# Altium PCB UC-425.PcbDoc (part 1 of 2)
Units mil, origin at the board's own origin, x right, y up, seen from the top; angles counter-clockwise.
Board outline 1574.8 x 1574.8 mil, 4 copper layers (Top Layer, MidLayer1, GND, Bottom Layer); 88 components, 85 nets, 465 pads, 244 vias.
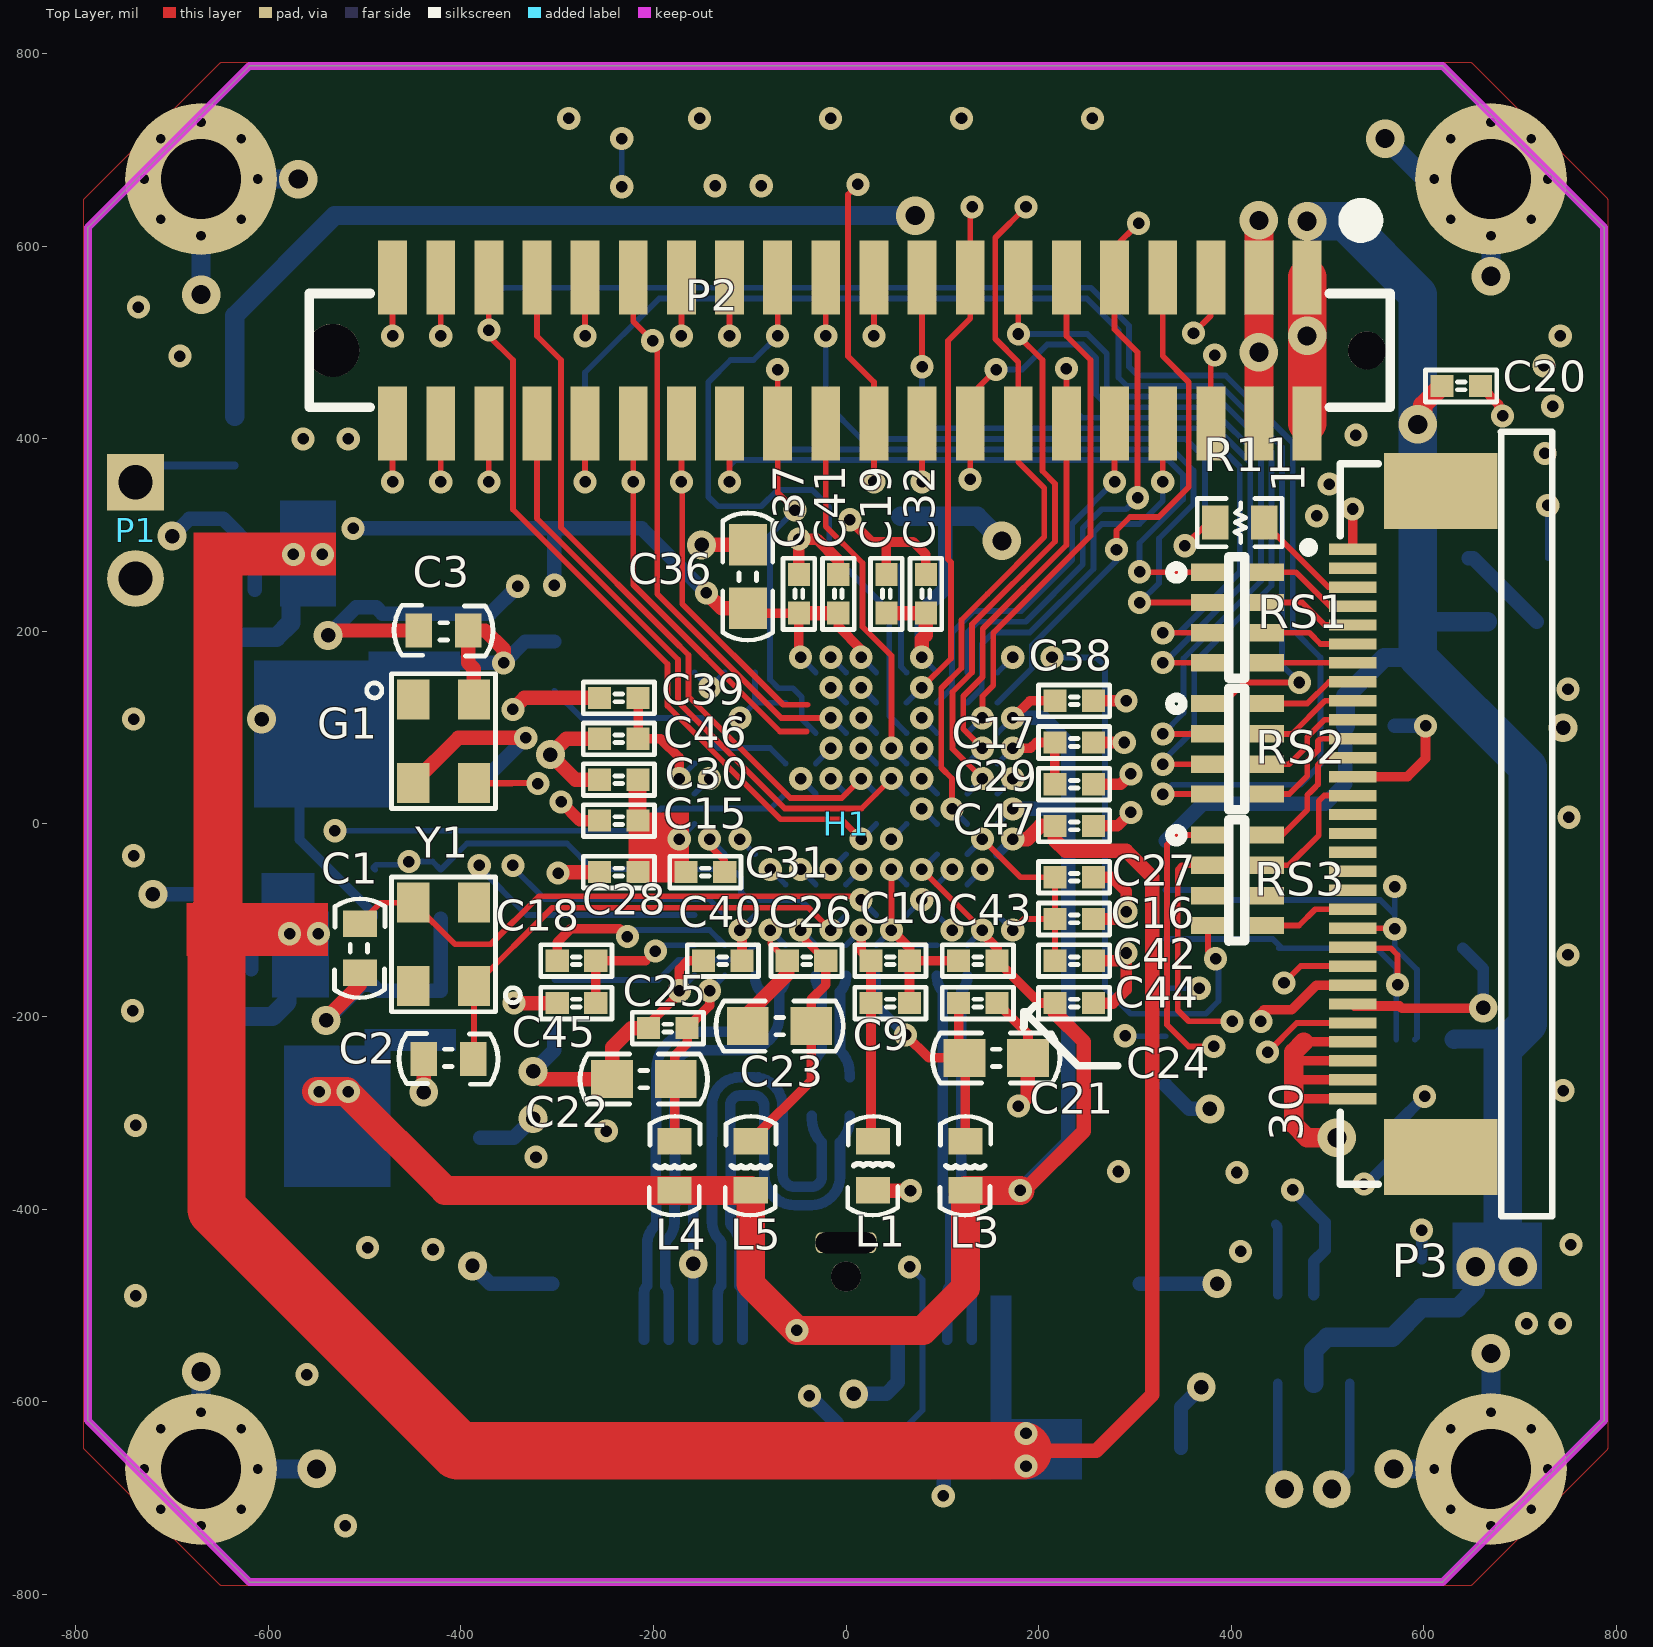
[diagram p0: Top Layer view]
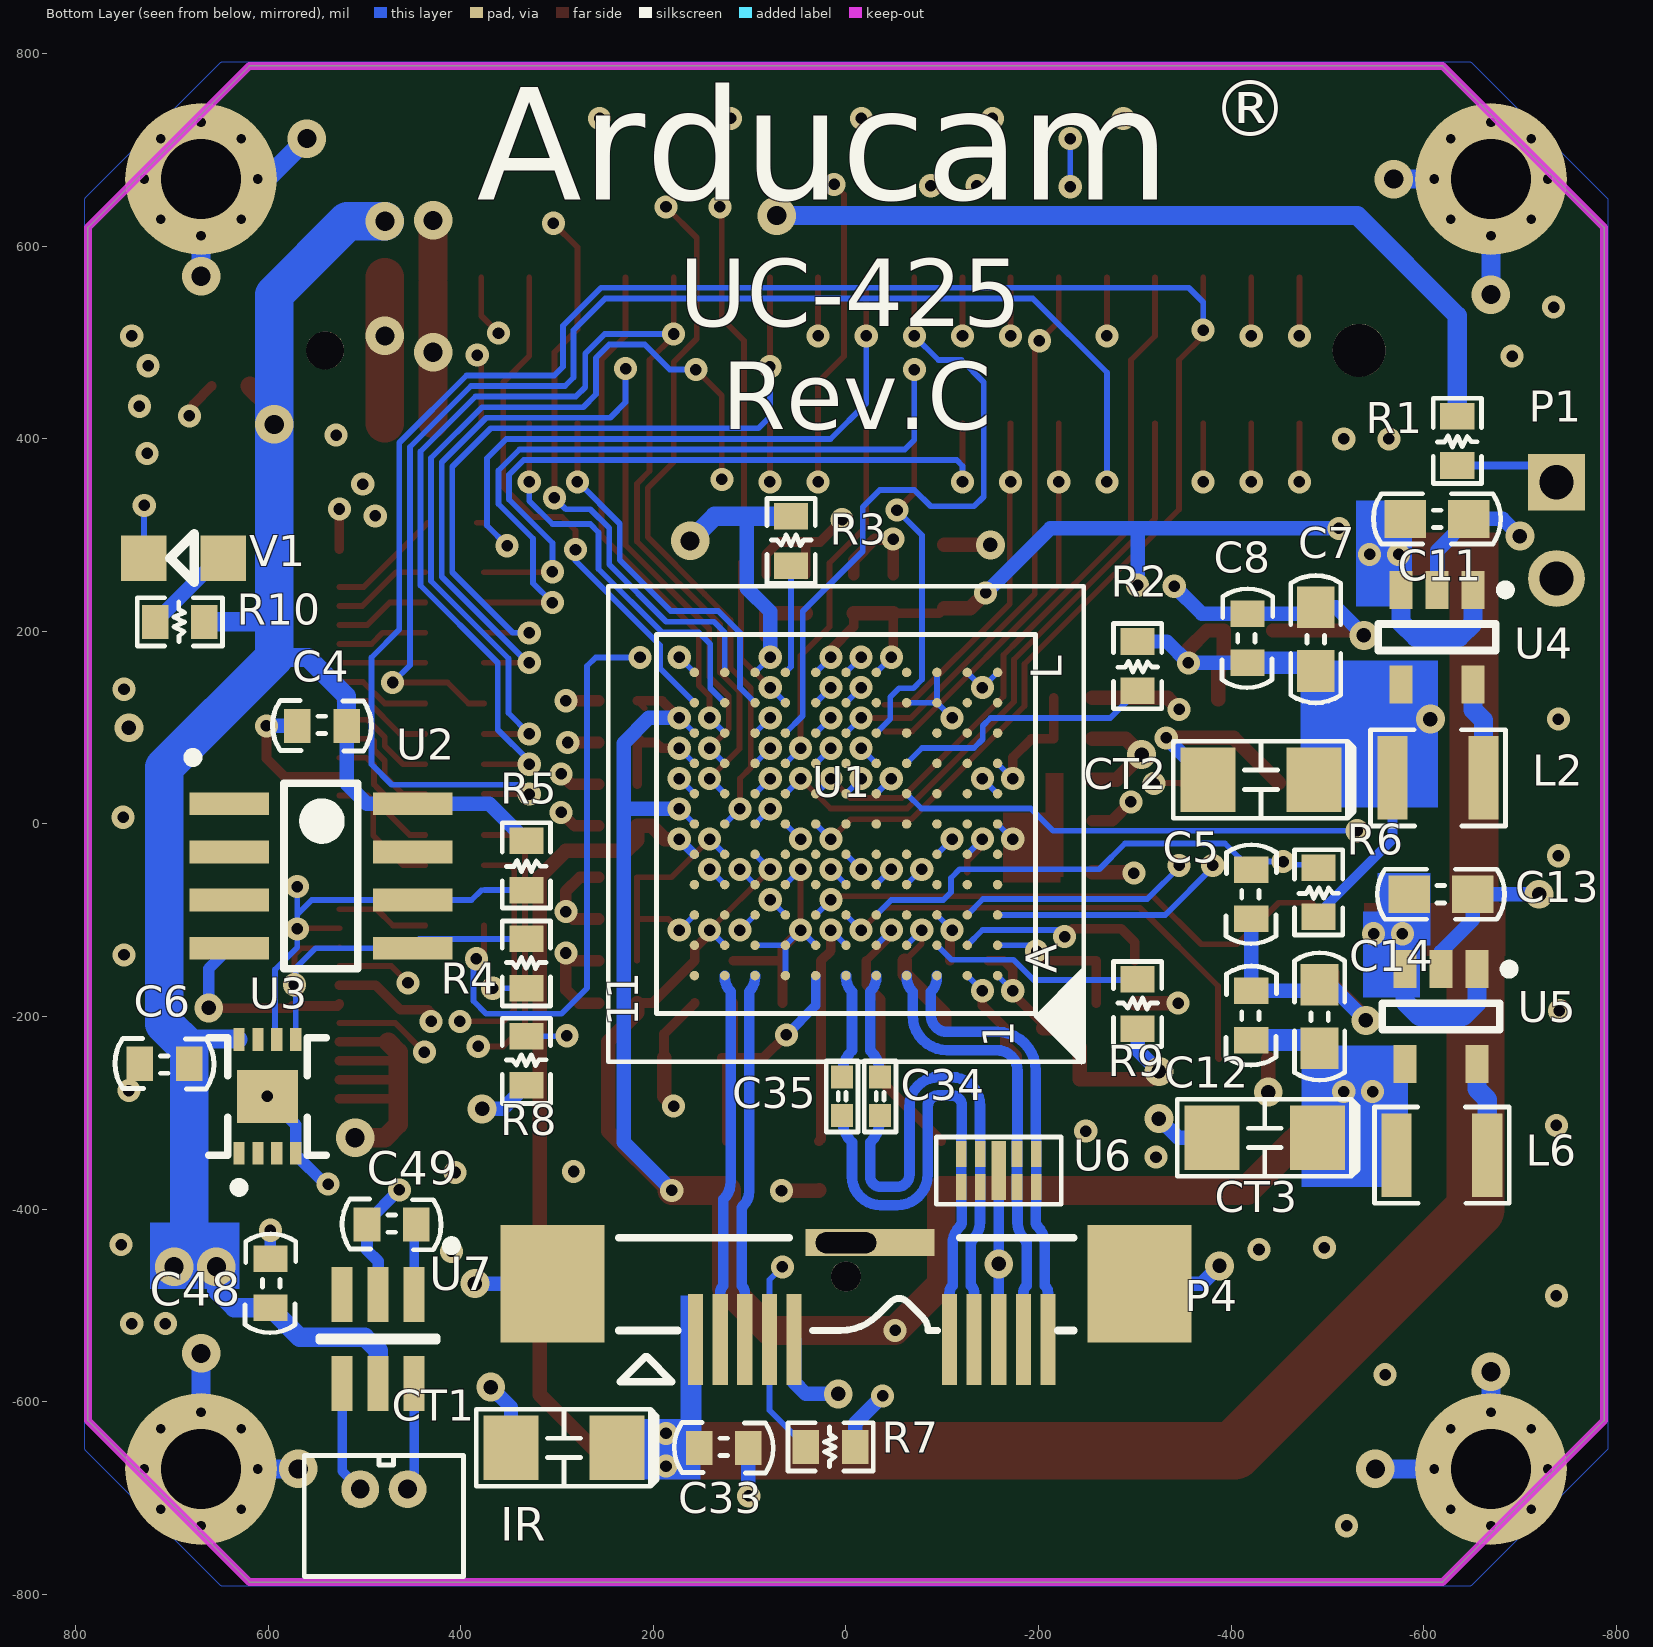
[diagram p1: Bottom Layer view, seen from below]
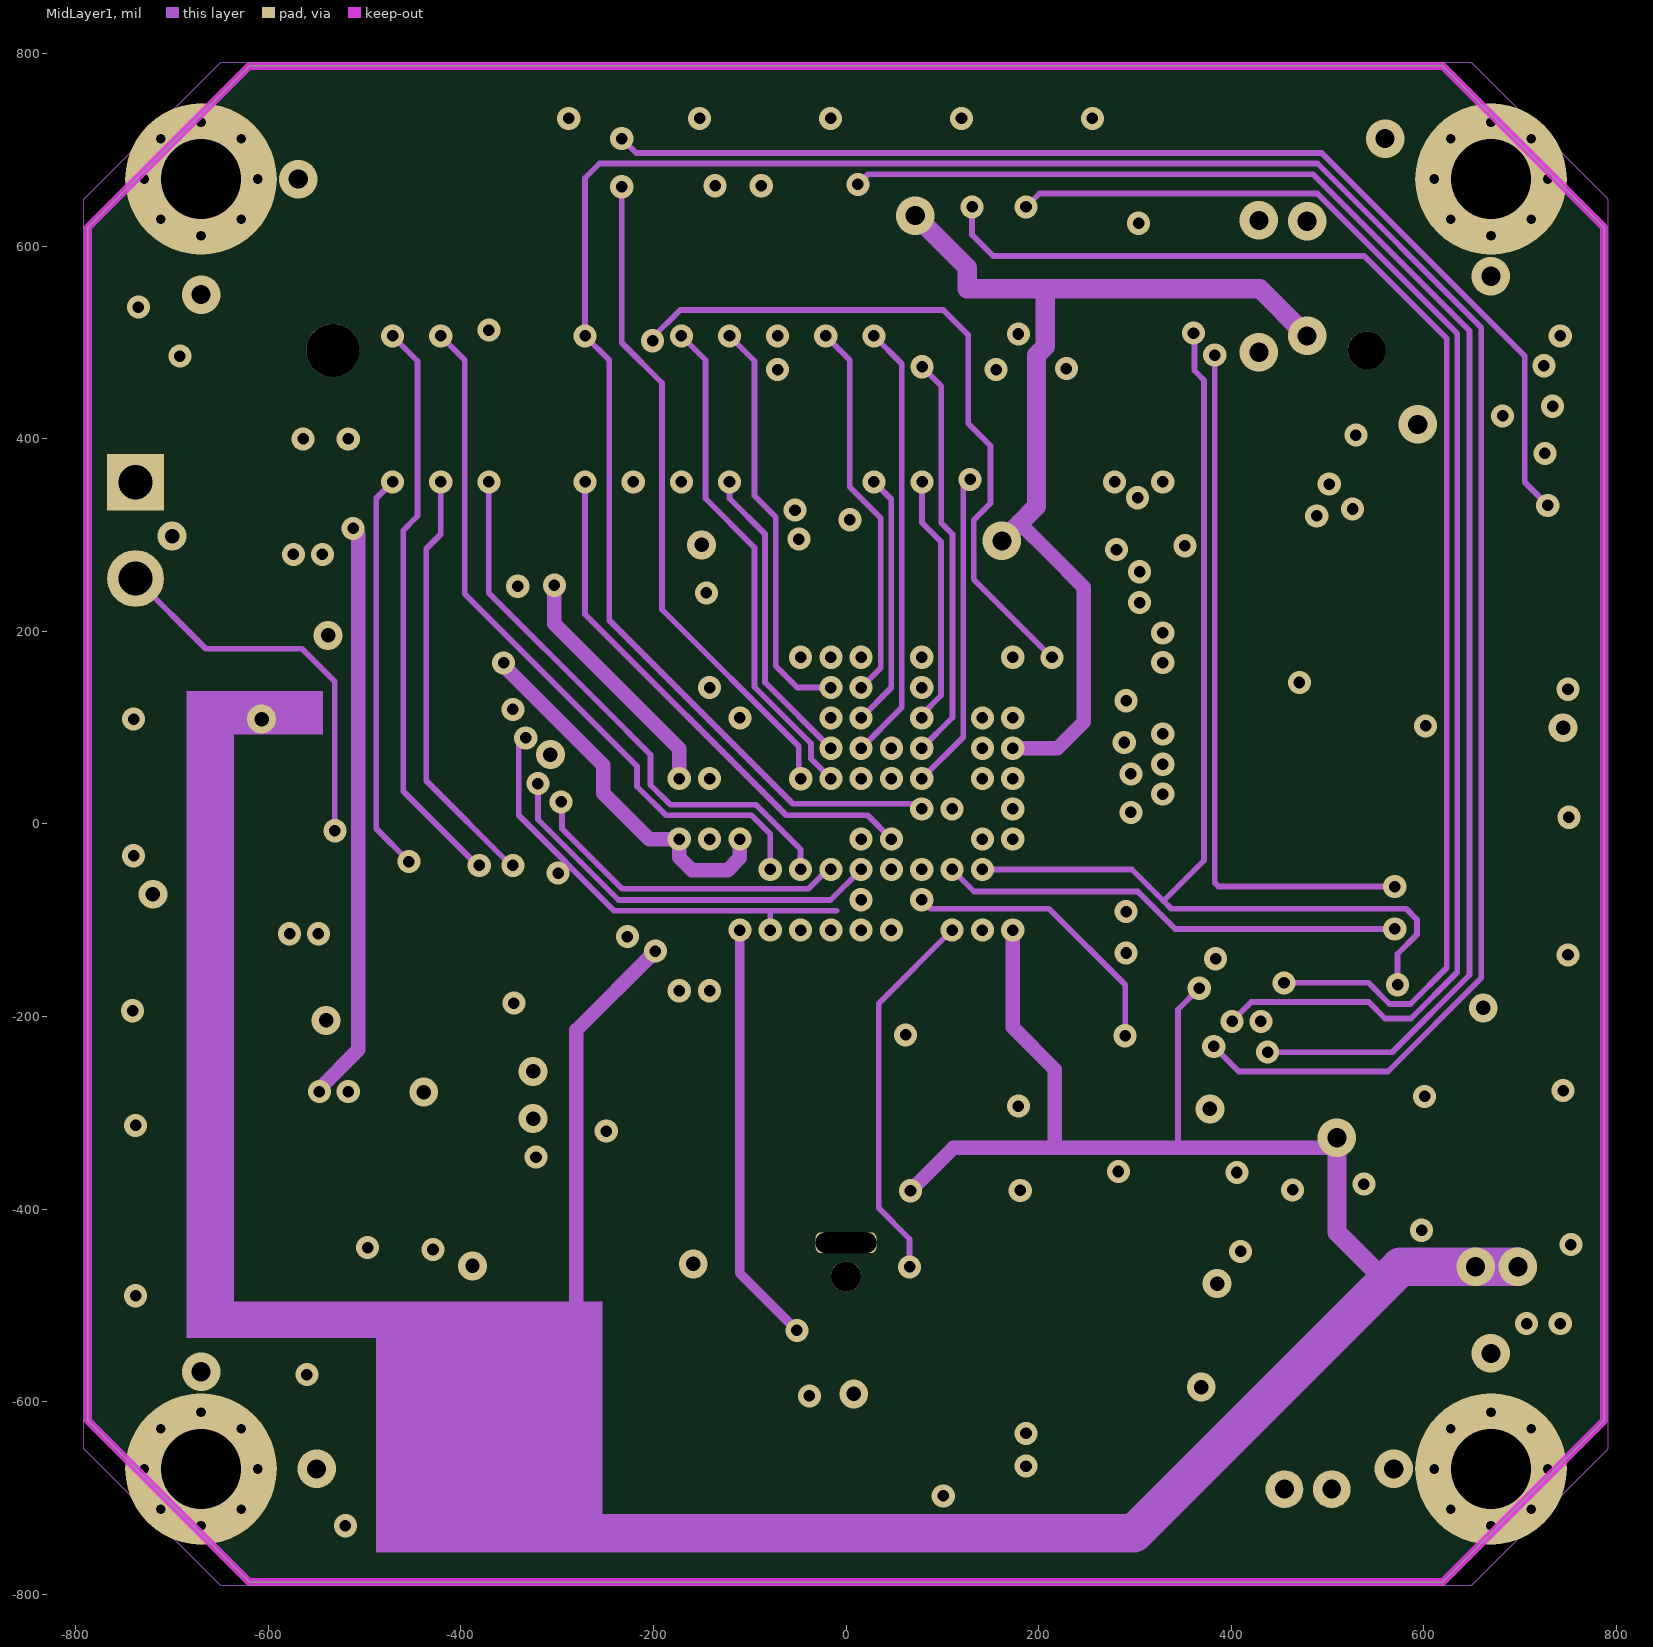
[diagram p2: MidLayer1]
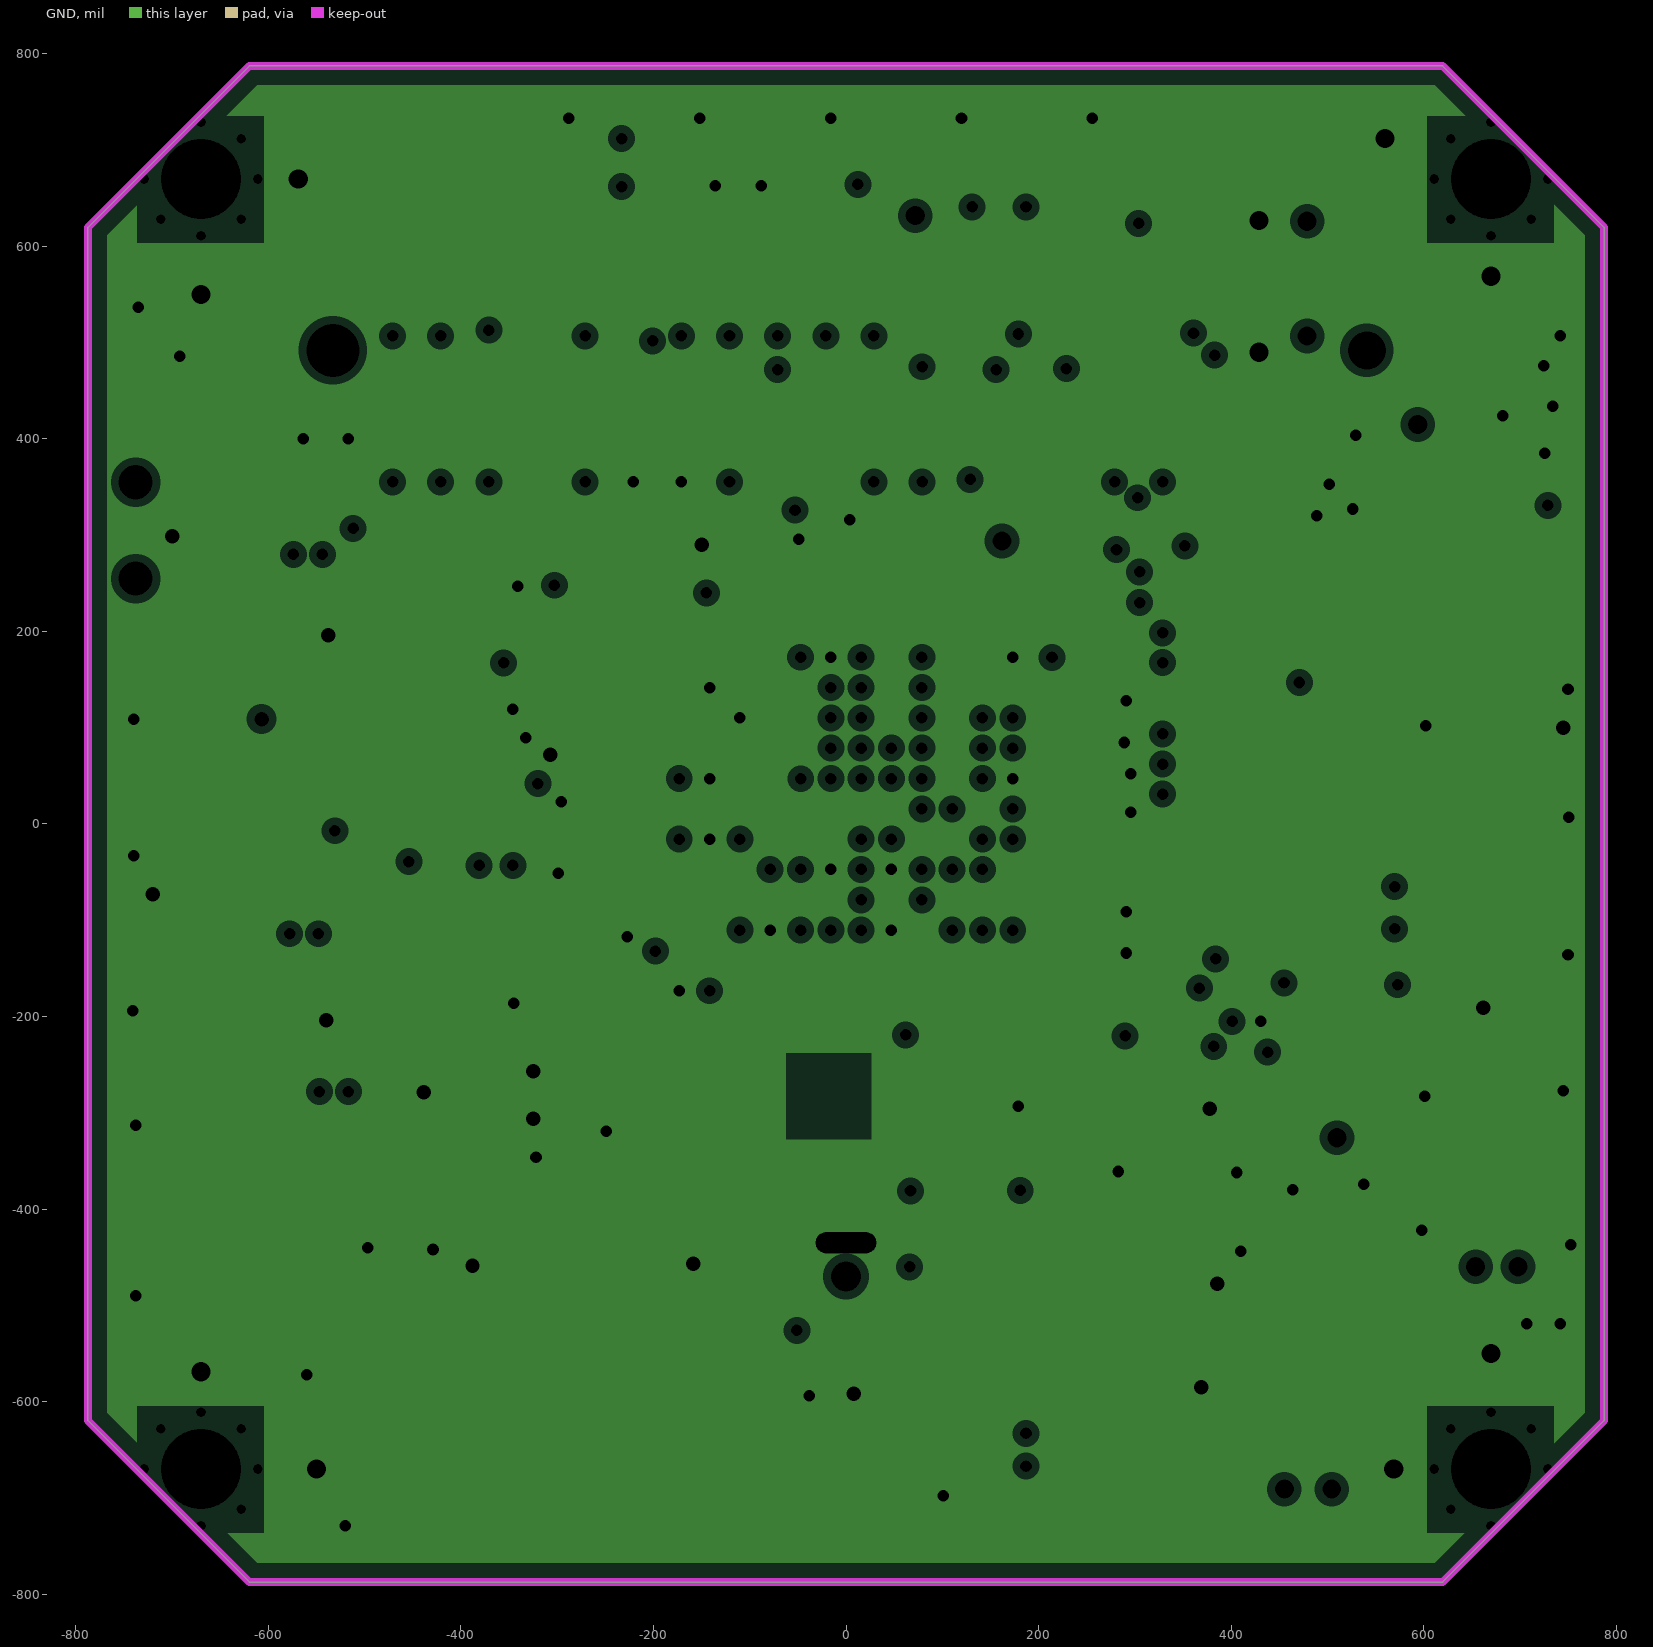
[diagram p3: GND, clearances drawn from the general rule]
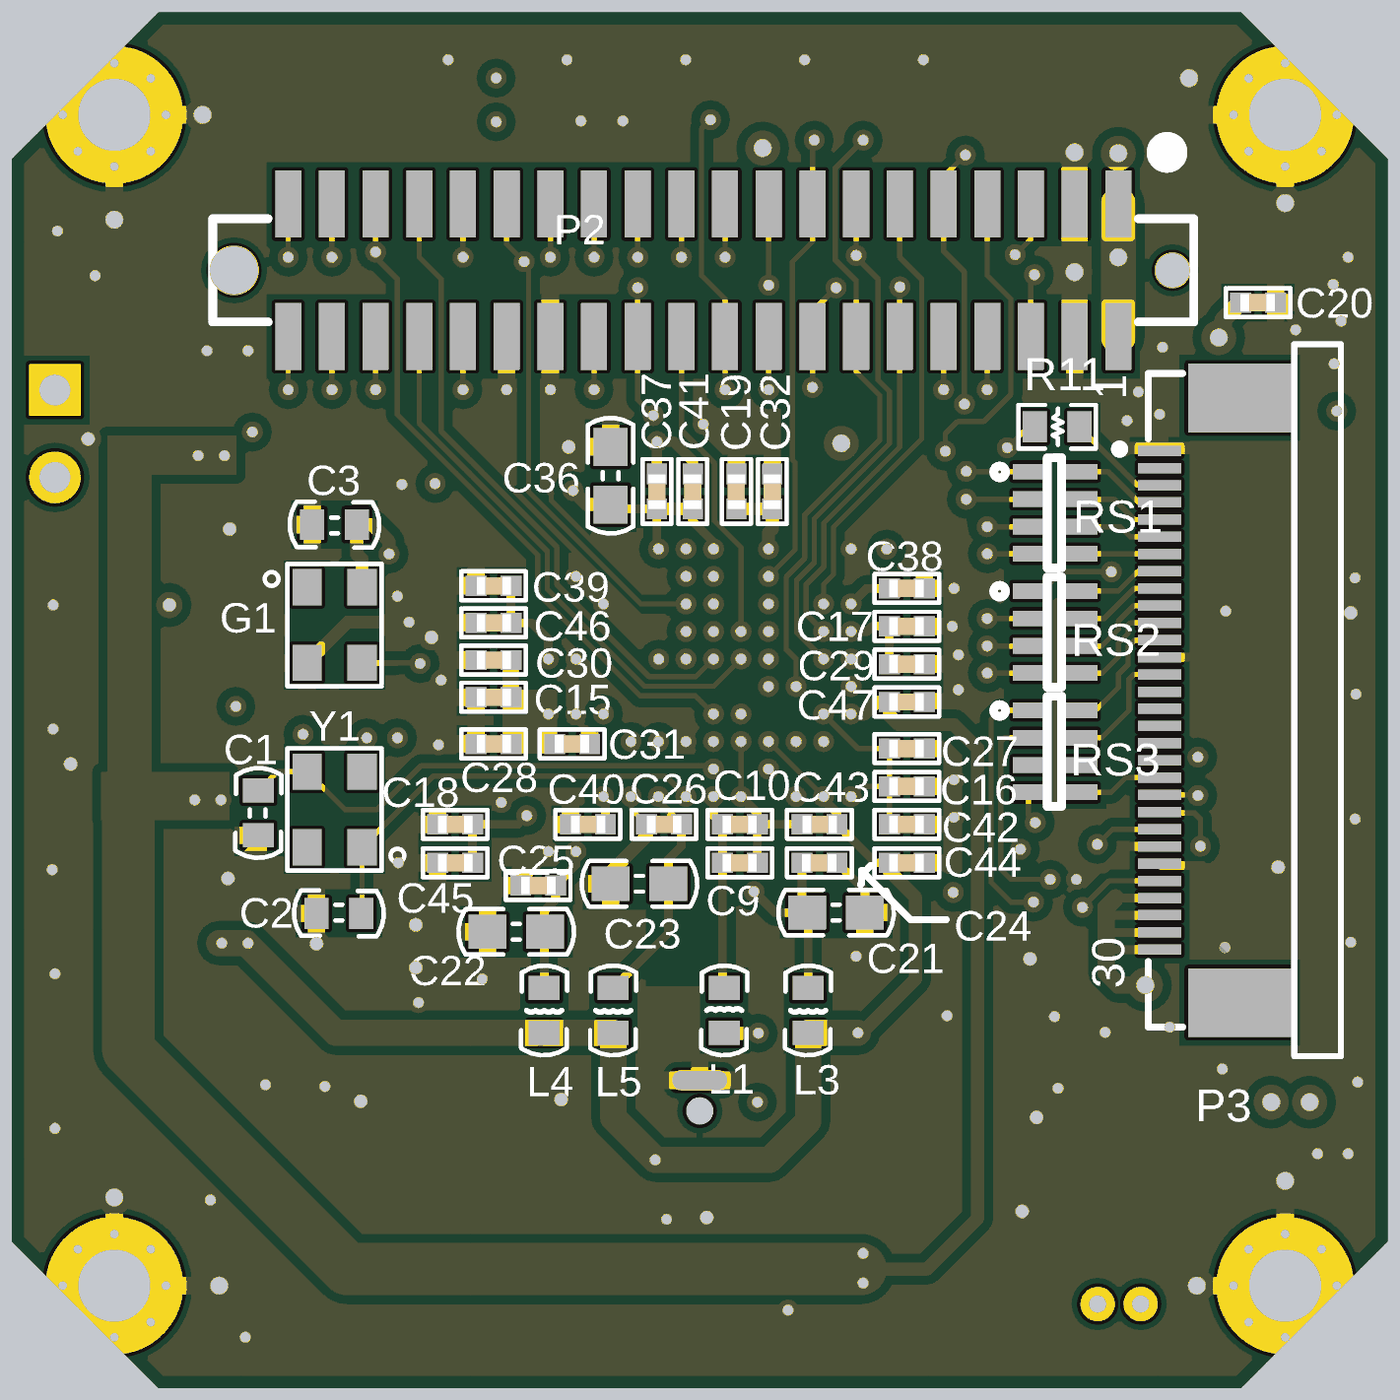
[diagram p5: 3D render of the assembled board from above, using the file's embedded part models]

## Layer stack, top to bottom
Top Layer: signal copper 1.4
Dielectric: core 12.6, FR-4, Dk 4.8
MidLayer1: signal copper 1.4
Dielectric: prepreg 12.6, FR-4, Dk 4.8
GND: plane copper 1.4, net GND
Dielectric: core 12.6, FR-4, Dk 4.8
Bottom Layer: signal copper 1.4

## Board outline
-787.4,-619.69 -787.4,619.68 -619.69,787.4 619.68,787.4 787.4,619.68 787.4,-619.69 619.68,-787.4 -619.69,-787.4

## Design rules (kind name [scope] priority, off if disabled: settings)
AssemblyTestPointUsage [All] p1 off:
AssemblyTestpoint [All] p1 off: testpointundercomponent=TRUE minsize=40 maxsize=100 preferedsize=60 minholesize=0 maxholesize=40 preferedholesize=32 testpointgrid=1 usegrid=TRUE gridtolerance=0.01 allowsidetop=TRUE allowsidebottom=TRUE
Clearance 铺铜安全间距 [InPolygon] p1: gap=10 // Protel DXP Scope 1 Expression Was: inpolygon
Clearance Clearance_1 [(InComponent('U3'))] p2: gap=5
Clearance 正常间距 [All] p3: gap=5
ComponentClearance [All] p1 off: gap=0 collisioncheckmode=3 verticalgap=10 showdistances=FALSE
DiffPairsRouting DiffPair_usbDiffPairsRouting [InDifferentialPair ('SSRX') Or InDifferentialPair ('SST') Or InDifferentialPair ('SSTX') Or InDifferentialPair ('D')] p1: maxlimit=8 minlimit=8 mostfreqgap=8 maxuncoupledlength=500
FabricationTestPointUsage TestPointUsage [All] p1 off: valid=0 allowmultiple=FALSE
FabricationTestpoint Testpoint [All] p1 off: side=3 testpointundercomponent=TRUE minsize=40 maxsize=100 preferedsize=60 minholesize=0 maxholesize=40 preferedholesize=32 testpointgrid=1 allowsidetop=TRUE allowsidebottom=TRUE usegrid=TRUE gridtolerance=0.01 // Protel DXP Scope 1 Expression Was: (IsPad And (OnTopLayer Or OnBottomLayer))
FanoutControl Fanout_Small [All] p1 off: bgadir=Out bgaviamode=Centered fanoutstyle=Auto fanoutdirection=Alternating viagrid=1 // Protel DXP Scope 1 Expression Was: (CompPinCount < 5)   Fanout_Small (Default Rule)
FanoutControl Fanout_Default [All] p2: bgadir=Out bgaviamode=Centered fanoutstyle=Auto fanoutdirection=Alternating viagrid=1 // Fanout_Default (Default Rule)
FanoutControl Fanout_SOIC [All] p3 off: bgadir=Out bgaviamode=Centered fanoutstyle=Auto fanoutdirection=Alternating viagrid=1 // Protel DXP Scope 1 Expression Was: IsSOIC   Fanout_SOIC (Default Rule)
FanoutControl Fanout_BGA [All] p4 off: bgadir=Out bgaviamode=Centered fanoutstyle=Auto fanoutdirection=Alternating viagrid=1 // Protel DXP Scope 1 Expression Was: IsBGA   Fanout_BGA (Default Rule)
FanoutControl Fanout_LCC [All] p5 off: bgadir=Out bgaviamode=Centered fanoutstyle=Auto fanoutdirection=Alternating viagrid=1 // Protel DXP Scope 1 Expression Was: IsLCC   Fanout_LCC (Default Rule)
MatchedLengths DiffPair_usbMatchedLengths [InDifferentialPair ('SSRX') Or InDifferentialPair ('SST') Or InDifferentialPair ('SSTX') Or InDifferentialPair ('D')] p1: tolerance=1000 checknetsindiffpair=TRUE checkdiffpairvsdiffpair=FALSE checkothers=FALSE
MinimumSolderMaskSliver [All] p1 off: minsoldermaskwidth=10
NetAntennae [All] p1 off: netantennaetolerance=0
PlaneClearance [All] p1: clearance=8
PlaneConnect POWER [InNET('VDD_BUS')OR InNET('VDD_IO')OR InNET('VDD28')OR InNET('VDD18')] p1: planeconnectstyle=Direct reliefexpansion=20 reliefentries=4 reliefconductorwidth=10 reliefairgap=10
PlaneConnect via1 [ISVIA] p2: planeconnectstyle=Direct reliefexpansion=20 reliefentries=4 reliefconductorwidth=10 reliefairgap=10
PlaneConnect pad1 [All] p3: planeconnectstyle=Relief reliefexpansion=20 reliefentries=4 reliefconductorwidth=10 reliefairgap=10
PolygonConnect via [IsVia] p1: connectstyle=Direct reliefconductorwidth=10 reliefentries=4 polygonreliefangle="90 Angle"
PolygonConnect pad [All] p2: connectstyle=Relief reliefconductorwidth=20 reliefentries=4 polygonreliefangle="90 Angle" // Protel DXP Scope 1 Expression Was: IsVia
RoutingCorners [All] p1: cornerstyle=Round minsetback=100 maxsetback=100
RoutingVias [All] p1: holewidth=12 width=24 viastyle="Through Hole" minholewidth=12 minwidth=24 maxholewidth=280 maxwidth=500
SilkToSilkClearance [All] p1 off: silktosilkclearance=10
SilkscreenOverComponentPads [IsPad] p1 off: minsilkscreentomaskgap=10
SolderMaskExpansion [All] p1 off: expansion=4
Width DiffPair_usbWidth [InDifferentialPair('SSRX') Or InDifferentialPair('SST') Or InDifferentialPair('SSTX') Or InDifferentialPair('D')] p1: maxlimit=11 minlimit=11 preferedwidth=11
Width [All] p2: maxlimit=80 minlimit=6 preferedwidth=6
10 further rules are at their usual default settings.

## Classes and differential pairs
component class CY7USB3014: C1 C2 C3 C4 C5 C6 C48 C49 G1 H1 IR P1 P2 P3 R1 R2 R3 R4 R5 R6 R10 R11 RS1 RS2 RS3 U1 U2 U3 U7 V1 Y1
component class 电源: C7 C8 C9 C10 C11 C12 C13 C14 C15 C16 C17 C18 C19 C20 C21 C22 C23 C24 C25 C26 C27 C28 C29 C30 C31 C32 C33 C34 C35 C36 C37 C38 C39 C40 C41 C42 C43 C44 C45 C46 C47 CT1 CT2 CT3 L1 L2 L3 L4 L5 L6 P4 R7 R8 R9 U4 U5 U6
differential pair D: +D_P -D_N
differential pair SSRX: +SSRX_P -SSRX_N
differential pair SST: +SST_P -SST_N
differential pair SSTX: +SSTX_P -SSTX_N

## Components (designator, comment, footprint, x,y, rotation, side; value= is the part's Value field where it differs from the comment)
C1 "12pF" 0603S-CAP -505,-129 r90 top
C2 "12pF" 0603S-CAP -413,-244 r0 top
C3 "0.1u" 0603S-CAP -418,201 r180 top
C4 "0.1uF" 0603S-CAP 544.39,102 r180 bottom
C5 "0.1u" 0603S-CAP -421,-73 r90 bottom
C6 "0.1u" 0603S-CAP 708,-249 r0 bottom
C7 "22u" C0805S-CAP -488,192 r90 bottom
C8 "0.1u" 0603S-CAP -417,193 r90 bottom
C9 "0.1u" C0402 46,-186 r0 top
C10 "0.01u" C0402 46,-142 r0 top
C11 "10u" C0805S-CAP -614,317 r180 bottom
C12 "0.1u" 0603S-CAP -421,-199 r90 bottom
C13 "10u" C0805S-CAP -618,-73 r180 bottom
C14 "22u" C0805S-CAP -492,-200 r90 bottom
C15 "0.1u" C0402 -236,3.5 r180 top
C16 "0.01u" C0402 237,-98.67 r0 top
C17 "0.1u" C0402 237,84.67 r0 top
C18 "0.01u" C0402 -280,-142 r180 top
C19 "0.1u" C0402 42,239 r90 top
C20 "0.01u" C0402 639,455 r0 top
C21 "2.2u" C0805S-CAP 156,-243 r0 top
C22 "22u" C0805S-CAP -210,-265 r180 top
C23 "22u" C0805S-CAP -69,-210 r180 top
C24 "0.1u" C0402 137,-186 r0 top
C25 "0.1u" C0402 -185,-212 r180 top
C26 "0.1u" C0402 -41,-142 r180 top
C27 "0.1u" C0402 237,-55.33 r0 top
C28 "0.01u" C0402 -236,-50 r180 top
C29 "0.1u" C0402 237,41.33 r0 top
C30 "0.01u" C0402 -236,46 r180 top
C31 "0.1u" C0402 -146,-50 r0 top
C32 "0.01u" C0402 83,239 r90 top
C33 "0.1u" 0603S-CAP 127,-648 r180 bottom
C34 "0.1u" C0402 -35.49,-283 r90 bottom
C35 "0.1u" C0402 4,-283 r90 bottom
C36 "22u" C0805S-CAP -102,257 r90 top
C37 "0.1u" C0402 -49,239 r90 top
C38 "0.01u" C0402 237,128 r0 top
C39 "0.1u" C0402 -236,131 r180 top
C40 "0.01u" C0402 -128,-142 r180 top
C41 "0.1u" C0402 -8,239 r90 top
C42 "0.1u" C0402 237,-142 r0 top
C43 "0.1u" C0402 137,-142 r180 top
C44 "0.01u" C0402 237,-186 r0 top
C45 "0.1u" C0402 -280,-186 r180 top
C46 "0.01u" C0402 -236,88.5 r180 top
C47 "0.1u" C0402 237,-2 r0 top
C48 "100nF" 0603S-CAP 598,-477 r270 bottom
C49 "1uF" 0603S-CAP 472,-416 r180 bottom
CT1 "10uF/16V" 钽电容（A型） 293,-648 r0 bottom
CT2 "10uF/16V" 钽电容（A型） -431,46 r0 bottom
CT3 "10uF/16V" 钽电容（A型） -435,-326 r0 bottom
G1 "32.768KHz" 爱普生晶振3.2×2.5MM -418,86 r270 top
H1 "FixedHole" 固定孔_1 0,0 r0 top locked
IR "Header 2" 1.25mm 480,-691 r0 bottom
L1 "磁珠" L0603 28,-355 r270 top
L2 "MDT2520-CR1R0M 1uH" L2520 -615,48 r0 bottom
L3 "磁珠" L0603 124,-355 r90 top
L4 "磁珠" L0603 -178,-355 r90 top
L5 "磁珠" L0603 -99,-355 r90 top
L6 "MDT2520-CR1R0M 1uH" L2520 -619,-344 r0 bottom
P1 "Header 2" HDR1X2 -738,355 r270 top
P2 "Header 20X2" "1.27mm 2*20" 4,492 r180 top locked
P3 "30PIN" FH12-30S-0.5SH 572,0 r270 top locked (schematic designator HDC1)
P4 "ED1127TR" ED1127TR 0,-470 r180 bottom locked
R1 "4.7K" 0603S-RES -635,398 r90 bottom
R2 "4.7K" 0603S-RES -303,164 r90 bottom
R3 "4.7K" 0603S-RES 57,294 r270 bottom
R4 "4.7K" 0603S-RES 332,-145 r270 bottom
R5 "4.7K" 0603S-RES 332,-43 r90 bottom
R6 "4.7K" 0603S-RES -491,-71 r90 bottom
R7 "0" 0603S-RES 16,-647 r180 bottom
R8 "6.04K-1%" 0603S-RES 332,-246 r270 bottom
R9 "200-1%" 0603S-RES -303,-187 r270 bottom
R10 "10K" 0603S-RES 692,210 r180 bottom
R11 "0" 0603S-RES 409,313 r180 top
RS1 "22" NC06-4 376,262 r270 top
RS2 "22" NC06-4 376,125.5 r270 top
RS3 "22" NC06-4 376,-11 r270 top
U1 "FX3_121_BUMP_0" 121_BGA_FX3 0,0 r0 bottom locked (schematic designator U3)
U2 "M24M02-DRMN6TP" SOIC127P600X175-8N 545.39,-54 r180 bottom
U3 "ATSHA204-MAH-DA-T" UDFN 601,-283 r90 bottom
U4 "SC189ZSKTRT" SOT23-5 -614,194 r270 bottom
U5 "SC189CSKTRT" SOT23-5 -618,-200 r270 bottom
U6 "ESD Protector" UDFN10_SP3010 -158.66,-360 r0 bottom
U7 "AP1511B" SOT-26 486,-535 r270 bottom
V1 "Red" LED0805S 688,276 r0 bottom
Y1 "19.2MHZ" "爱普生晶振3.2×2.5MM - 无源" -418,-125 r90 top

## Footprints (in the part's own frame and the unit in brackets; to place one, negate y for a bottom-side part, rotate by r counter-clockwise, add the part's x,y. Pads: shape width x height; smd on the part's side, far side on the other; paste and mask are expansions set on the pad)
1.25mm [mm]
  round 1 hole 0.5: 1(0.625,0) 2(-0.625,0)
  silkscreen extent -2.1,-0.89 2.1,2.3
"1.27mm 2*20" [mm]
  round 1 hole 1: 0(-13.64,0)
  round 1.4 hole 1.4: 0(13.64,0)
  rect 0.76x1.95 smd: 1(-12.065,-1.925) 2(-12.065,1.925) 3(-10.795,-1.925) 4(-10.795,1.925) 5(-9.525,-1.925) 6(-9.525,1.925) 7(-8.255,-1.925) 8(-8.255,1.925) 9(-6.985,-1.925) 10(-6.985,1.925) 11(-5.715,-1.925) 12(-5.715,1.925) 13(-4.445,-1.925) 14(-4.445,1.925) 15(-3.175,-1.925) 16(-3.175,1.925) 17(-1.905,-1.925) 18(-1.905,1.925) 19(-0.635,-1.925) 20(-0.635,1.925) 21(0.635,-1.925) 22(0.635,1.925) 23(1.905,-1.925) 24(1.905,1.925) 25(3.175,-1.925) 26(3.175,1.925) 27(4.445,-1.925) 28(4.445,1.925) 29(5.715,-1.925) 30(5.715,1.925) 31(6.985,-1.925) 32(6.985,1.925) 33(8.255,-1.925) 34(8.255,1.925) 35(9.525,-1.925) 36(9.525,1.925) 37(10.795,-1.925) 38(10.795,1.925) 39(12.065,-1.925) 40(12.065,1.925)
  silkscreen extent -14.26,-3.7 14.26,1.5
121_BGA_FX3 [mil] "FX3_121_BUMP"
  round 9.85 smd: A1(-157.45,157.45) A2(-125.96,157.45) A3(-94.47,157.45) A4(-62.98,157.45) A5(-31.49,157.45) A6(0,157.45) A7(31.49,157.45) A8(62.98,157.45) A9(94.47,157.45) A10(125.96,157.45) A11(157.45,157.45) B1(-157.45,125.96) B2(-125.96,125.96) B3(-94.47,125.96) B4(-62.98,125.96) B5(-31.49,125.96) B6(0,125.96) B7(31.49,125.96) B8(62.98,125.96) B9(94.47,125.96) B10(125.96,125.96) B11(157.45,125.96) C1(-157.45,94.47) C2(-125.96,94.47) C3(-94.47,94.47) C4(-62.98,94.47) C5(-31.49,94.47) C6(0,94.47) C7(31.49,94.47) C8(62.98,94.47) C9(94.47,94.47) C10(125.96,94.47) C11(157.45,94.47) D1(-157.45,62.98) D2(-125.96,62.98) D3(-94.47,62.98) D4(-62.98,62.98) D5(-31.49,62.98) D6(0,62.98) D7(31.49,62.98) D8(62.98,62.98) D9(94.47,62.98) D10(125.96,62.98) D11(157.45,62.98) E1(-157.45,31.49) E2(-125.96,31.49) E3(-94.47,31.49) E4(-62.98,31.49) E5(-31.49,31.49) E6(0,31.49) E7(31.49,31.49) E8(62.98,31.49) E9(94.47,31.49) E10(125.96,31.49) E11(157.45,31.49) F1(-157.45,0) F2(-125.96,0) F3(-94.47,0) F4(-62.98,0) F5(-31.49,0) F6(0,0) F7(31.49,0) F8(62.98,0) F9(94.47,0) F10(125.96,0) F11(157.45,0) G1(-157.45,-31.49) G2(-125.96,-31.49) G3(-94.47,-31.49) G4(-62.98,-31.49) G5(-31.49,-31.49) G6(0,-31.49) G7(31.49,-31.49) G8(62.98,-31.49) G9(94.47,-31.49) G10(125.96,-31.49) G11(157.45,-31.49) H1(-157.45,-62.98) H2(-125.96,-62.98) H3(-94.47,-62.98) H4(-62.98,-62.98) H5(-31.49,-62.98) H6(0,-62.98) H7(31.49,-62.98) H8(62.98,-62.98) H9(94.47,-62.98) H10(125.96,-62.98) H11(157.45,-62.98) J1(-157.45,-94.47) J2(-125.96,-94.47) J3(-94.47,-94.47) J4(-62.98,-94.47) J5(-31.49,-94.47) J6(0,-94.47) J7(31.49,-94.47) J8(62.98,-94.47) J9(94.47,-94.47) J10(125.96,-94.47) J11(157.45,-94.47) K1(-157.45,-125.96) K2(-125.96,-125.96) K3(-94.47,-125.96) K4(-62.98,-125.96) K5(-31.49,-125.96) K6(0,-125.96) K7(31.49,-125.96) K8(62.98,-125.96) K9(94.47,-125.96) K10(125.96,-125.96) K11(157.45,-125.96) L1(-157.45,-157.45) L2(-125.96,-157.45) L3(-94.47,-157.45) L4(-62.98,-157.45) L5(-31.49,-157.45) L6(0,-157.45) L7(31.49,-157.45) L8(62.98,-157.45) L9(94.47,-157.45) L10(125.96,-157.45) L11(157.45,-157.45)
  silkscreen extent -247,-247 247,250
0603S-CAP [mm]
  rect 0.7x0.9 smd: 1(-0.65,0) 2(0.65,0)
  silkscreen extent -1.31,-0.67 1.31,0.67
0603S-RES [mm]
  rect 0.7x0.9 smd: 1(-0.65,0) 2(0.65,0)
  silkscreen extent -1.12,-0.64 1.12,0.64
C0402 [mil]
  rect 24x23 smd: 1(-20,0) 2(20,0)
  silkscreen extent -37,-16 37,16, body extent -20,-10 19,10, height 20
C0805S-CAP [mm]
  rect 1.1x1 smd: 1(0.838,0) 2(-0.838,0)
  silkscreen extent -1.68,-0.66 1.68,0.66
ED1127TR [mm] "USB3_CMS1811-01"
  rect 0.4x2.4 smd: 1(-3.97,-1.665) 2(-3.32,-1.665) 3(-2.67,-1.665) 4(-2.02,-1.665) 5(-1.37,-1.665) 6(2.73,-1.665) 7(3.38,-1.665) 8(4.03,-1.665) 9(4.68,-1.665) 10(5.33,-1.665)
  rect 2.75x3.1 smd: 11(-7.745,-0.19) 12(7.745,-0.19)
  rrect50% 1.6x0.55 hole 0.55 slot 1.6 at 0 deg: 13(0,0.89)
  rect 3.4x0.711 smd: 13(0.63,0.89)
  round 0.8 hole 0.8 unplated: 14(0,0)
  silkscreen extent -5.99,-2.77 6.01,1.02
FH12-30S-0.5SH [mm] "Connector; FH12 Series; 20 Position; 0.5mm Spaced Bottom Contact"
  rect 0.3x1.25 smd: 1(-7.25,-1.162) 2(-6.75,-1.162) 3(-6.25,-1.162) 4(-5.75,-1.162) 5(-5.25,-1.162) 6(-4.75,-1.162) 7(-4.25,-1.162) 8(-3.75,-1.162) 9(-3.25,-1.162) 10(-2.75,-1.162) 11(-2.25,-1.162) 12(-1.75,-1.162) 13(-1.25,-1.162) 14(-0.75,-1.162) 15(-0.25,-1.162) 16(0.25,-1.162) 17(0.75,-1.162) 18(1.25,-1.162) 19(1.75,-1.162) 20(2.25,-1.162) 21(2.75,-1.162) 22(3.25,-1.162) 23(3.75,-1.162) 24(4.25,-1.162) 25(4.75,-1.162) 26(5.25,-1.162) 27(5.75,-1.162) 28(6.25,-1.162) 29(6.75,-1.162) 30(7.25,-1.162)
  rect 2x3 smd: 31(-8.79,1.163) 31(8.79,1.163)
  silkscreen extent -10.35,-2.45 10.35,4.11
HDR1X2 [mm] "Connector; Header; 2 Position"
  rect 1.5x1.5 hole 0.9: 1(0,0)
  round 1.5 hole 0.9: 2(2.54,0)
L0603 [mm]
  rect 0.7x0.9 smd: 1(-0.65,0) 2(0.65,0)
  silkscreen extent -1.31,-0.67 1.31,0.67
L2520 [mm]
  rect 0.8x2.2 smd: 1(-1.2,0) 2(1.2,0)
  silkscreen extent -1.78,-1.27 1.78,1.27
LED0805S [mm]
  rect 1.2x1.2 smd: 1(-1.05,0) 2(1.05,0)
  silkscreen extent -0.27,-0.64 0.36,0.63, body extent -0.98,-0.46 1.08,0.45, height 0.85
NC06-4 [mil]
  rect 18x36 smd: 1(0.4,0.16) 2(31.9,0.16) 3(63.39,0.16) 4(94.4,0.16) 5(94.4,61.16) 6(63.39,61.16) 7(31.9,61.16) 8(0.4,61.16)
  silkscreen extent -16,-40 111,38
SOIC127P600X175-8N [mm] "SOIC, 8-Leads, Body 4.9x3.9mm (max), Pitch 1.27mm, IPC Medium Density"
  rect 2.1x0.6 smd: 1(-2.425,1.905) 2(-2.425,0.635) 3(-2.425,-0.635) 4(-2.425,-1.905) 5(2.425,-1.905) 6(2.425,-0.635) 7(2.425,0.635) 8(2.425,1.905)
  silkscreen extent -3.5,-2.45 0.98,3.25, body extent -1.95,-2.45 1.95,2.45, height 1.75
SOT23-5 [mm] "SOT23, 5-Leads, Body 3.1x3.0mm (max), Pitch 0.95mm, IPC Medium D"
  rect 1x0.6 smd: 1(-1.25,0.95) 2(-1.25,0) 3(-1.25,-0.95) 4(1.25,-0.95) 5(1.25,0.95)
  silkscreen extent -1.37,-1.55 0.35,1.92, body extent -0.9,-1.55 0.9,1.55, height 1.1
SOT-26 [mm] "TSOP, 6-Leads, Body 3.1x1.7mm (max), Pitch 0.95mm, IPC Medium Density"
  rect 1.45x0.55 smd: 1(-1.175,0.95) 2(-1.175,0) 3(-1.175,-0.95) 4(1.175,-0.95) 5(1.175,0) 6(1.175,0.95)
  silkscreen extent -2.59,-1.55 0.05,2.06, body extent -0.85,-1.55 0.85,1.55, height 1.3
UDFN [mm] "QFN, 8-Leads, Body 2.1x3.1mm (max), Pitch 0.50mm, IPC Medium Density"
  rect 0.6x0.3 smd: 1(-1.5,0.75) 2(-1.5,0.25) 3(-1.5,-0.25) 4(-1.5,-0.75) 5(1.5,-0.75) 6(1.5,-0.25) 7(1.5,0.25) 8(1.5,0.75)
  rect 1.4x1.6 smd: 4(0,0)
  silkscreen extent -2.52,-1.55 1.55,1.55, body extent -1.5,-1 1.52,1, height 0.6
UDFN10_SP3010 [mil] "UDFN10_"
  rect 11x27 smd: 1(39,17) 2(19,17) 4(-19,17) 5(-39,17) 6(-39,-17) 7(-19,-17) 9(19,-17) 10(39,-17)
  rect 14.96x35.5 smd: 3(0,12.75) 8(0,-12.75)
  silkscreen extent -65,-35 65,35
固定孔_1 [mil]
  round 15 hole 10: 0(-729.05,-670) 0(-729.05,670) 0(-711.73,-711.73) 0(-711.73,-628.27) 0(-711.73,628.27) 0(-711.73,711.73) 0(-670,-729.05) 0(-670,-610.94) 0(-670,610.95) 0(-670,729.06) 0(-628.27,-711.73) 0(-628.27,-628.27) 0(-628.27,628.27) 0(-628.27,711.73) 0(-610.94,-670) 0(-610.94,670) 0(610.94,-670) 0(610.94,670) 0(628.27,-711.73) 0(628.27,-628.27) 0(628.27,628.27) 0(628.27,711.73) 0(670,-729.05) 0(670,-610.94) 0(670,610.95) 0(670,729.06) 0(711.73,-711.73) 0(711.73,-628.27) 0(711.73,628.27) 0(711.73,711.73) 0(729.06,-670) 0(729.06,670)
  round 157.48 hole 82.68: 0(-670,-670) 0(-670,670) 0(670,-670) 0(670,670)
爱普生晶振3.2×2.5MM [mm]
  rect 1.05x0.85 smd: 1(-1.1,-0.8) 2(1.1,-0.8) 3(1.1,0.8) 4(-1.1,0.8)
  Top Layer pour cut-out: -1.778,1.372 -1.778,-1.372 1.778,-1.372 1.778,1.372
  silkscreen extent -1.78,-2.03 1.78,1.37
"爱普生晶振3.2×2.5MM - 无源" [mm]
  rect 1.05x0.85 smd: 1(-1.1,-0.8) 2(1.1,0.8) 3(1.1,-0.8) 4(-1.1,0.8)
  Top Layer pour cut-out: -1.778,1.372 -1.778,-1.372 1.778,-1.372 1.778,1.372
  silkscreen extent -1.78,-2.03 1.78,1.37
钽电容（A型） [mm]
  rect 1.45x1.7 smd: 1(-1.397,0) 2(1.397,0)
  silkscreen extent -2.46,-1.02 2.31,1.02

## Part data
C1 C2: library part "CAP CER SMT 4.3pF 0805", "CAP CER SMT 4.3pF 0805"
C3 C6: library part CAP, "RC=1206"
C4: library part "CAP SMT 0.1uF 16V X7R", "CAP SMT 0.1uF 16V X7R"
C5 C48 C49: library part Cap, "50V/8.2u/0805"
C7 C8 C9 C10 C11 C12 C14 C15 C16 C17 C18 C19 C20 C21 C22 C23 C24 C25 C26 C27 C28 C29 C30 C31 C32 C33 C34 C35 C36 C37 C38 C39 C40 C41 C42 C43 C44 C45 C46 C47: library part CAP0805, "Capacitor"
C13: library part Cap, "Capacitor"
CT1 CT2 CT3: library part "Cap Pol2", "Polarized Capacitor (Axial)"
G1: library part CTY4-B
H1: library part 固定孔
IR P1: "Header, 2-Pin"
L1 L2 L3 L4 L5 L6: library part Inductor, "Inductor"
P2: "Header, 20-Pin, Dual row"
P3: library part "Header 30", "Header, 30-Pin"
P4: library part GSB343133HR_2, "CONN RCPT USB 3.0 MICRO-B SMD"
R1 R2 R3 R4 R5 R6 R7 R8 R9 R10 R11: library part Res2, "Resistor"
RS1 RS2 RS3: library part RN4
U2: library part 24LC64-I/SN, "IC EEPROM 64KBIT 400KHZ 8SOIC"
U3: library part AT24C128
U4 U5: library part PAM3101DAB150
U6: library part AZ1065-06Q_0, "TVS DIODE 6VWM 12.3VC UDFN"
V1: library part LED0, "Typical INFRARED GaAs LED"
Y1: library part "XTAL 32.768KHZ", "Crystal, CRYSTAL 32.768KHZ 6PF SMD"

## Via types
v1: diameter 24, hole 12, Top Layer to Bottom Layer, tented both sides, 207 vias
v2: diameter 40, hole 20, Top Layer to Bottom Layer, tented both sides, 18 vias
v3: diameter 30, hole 15, Top Layer to Bottom Layer, tented both sides, 18 vias
v4: diameter 24, hole 12, Top Layer to Bottom Layer, tented top, 1 vias

## Nets (pads, with @x,y where several pads share a name; then routed paths per layer and width w, separated by ;. In a path a pad name is that pad's centre, name@x,y a point inside that pad or via, vN(x,y) a via of type N, cw(c..) or ccw(c..) an arc to the next point about the centre after c; other vN are vias at no path point)
AVDD: C21.2 C24.1 L3.2 U1.A7 | length 297
  Top Layer w10: v1(62,-219) 86,-243 C21.2@123,-243 ; C24.1@117,-186 117,-237 C21.2@123,-243 ; L3.2@124,-329.41 C21.2@124,-244 ; C21.2@129,-244 129,-243 C21.2@123,-243
  Bottom Layer w10: U1.A7@31.49,-157.45 31.49,-188.49 v1(62,-219)
CLK_OUT: G1.3 U1.D6 | length 549.8
  Top Layer w6: -347,42 -385.81,42 G1.3@-386.5,42.69 -320.69,42.69 v1(-320,42)
  MidLayer1 w6: v1(-320,42) -320,4.56 -236.44,-79 -16.02,-79 v1(15.74,-47.24)
  Bottom Layer w6: U1.D6@0,-62.98 v1(15.74,-47.24)
D0_IO: P3.18
D1_IO: P3.17
D2_IO: P3.16
D3_IO: P3.15
D4_IO: P3.14 RS3.7 | length 140
  Top Layer w6: RS3.7@437.16,-42.9 459.98,-42.9 491,-11.88 491,23.84 496.69,29.53 P3.14@526.23,29.53
D5_IO: P3.12 RS3.8 | length 143.1
  Top Layer w6: RS3.8@437.16,-11.4 453.16,-11.4 479.16,14.6 479.16,30 483.28,34.12 486.41,37.24 490.16,41 490.16,61.05 498.01,68.9 P3.12@526.23,68.9
D6_IO: P3.11 RS2.5 | length 152.1
  Top Layer w6: RS2.5@437.16,31.1 460.47,31.1 479.16,49.79 479.16,65.61 490.16,76.61 490.16,85.89 492.86,88.58 P3.11@526.23,88.58 P3.11@501.7,88.58
D7_IO: P3.10 RS2.6 | length 113.6
  Top Layer w6: RS2.6@437.16,62.11 460.11,62.11 479.16,81.16 479.16,90.44 496.99,108.27 P3.10@526.23,108.27
D8_IO: P3.9 RS2.7 | length 103.3
  Top Layer w6: RS2.7@437.16,93.6 463.16,93.6 497.51,127.95 P3.9@526.23,127.95
D9_IO: P3.8 RS2.8 | length 98.4
  Top Layer w6: RS2.8@437.16,125.1 479.1,125.1 501.64,147.64 P3.8@526.23,147.64
D10_IO: P3.7 RS1.5 | length 89.2
  Top Layer w6: RS1.5@437.16,167.6 525.96,167.6 P3.7@526.23,167.32
D11_IO: P3.6 RS1.6 | length 93.9
  Top Layer w6: RS1.6@437.16,198.61 481.39,198.61 492.99,187.01 P3.6@526.23,187.01
D_N: P4.2 U1.A10 | length 382.7
  Bottom Layer w11: U1.A10@125.96,-157.45 125.96,-159.04 cw(c104.64,-159.04) 119.71,-174.12 119.71,-371.41 ccw(c146,-371.41) 127.41,-390 127.41,-479.51 cw(c119.46,-487.47) 130.71,-487.47 P4.2@130.71,-535.55
D_P: P4.3 U1.A9 | length 382.7
  Bottom Layer w11: U1.A9@94.47,-157.45 94.47,-159.04 ccw(c115.79,-159.04) 100.72,-174.12 100.71,-382.3 ccw(c119.72,-382.3) 106.28,-395.74 cw(c101.13,-400.89) 108.41,-400.89 108.41,-479.51 ccw(c116.37,-487.47) 105.12,-487.47 P4.3@105.12,-535.55
FRV_IO: P3.4 RS1.8 | length 103.7
  Top Layer w6: RS1.8@437.16,261.6 467.4,261.6 502.62,226.38 P3.4@526.23,226.38
FX3_CTL0: P2.15 P3.23 U1.K8 | length 2038.1
  Top Layer w6: v1(78.72,141.7) 109,171.98 109,272 106.04,274.96 106.04,348 106.04,502.04 109,505 129,525 P2.15@129,567.79 129,639 v1(131,641) ; v1(455,-165) 472.36,-147.64 P3.23@526.23,-147.64
  MidLayer1 w6: v1(131,641) 131,612 153,590 538.33,590 624,504.33 624,-149.33 586.33,-187 564.72,-187 542.72,-165 v1(455,-165)
  Bottom Layer w6: U1.K8@62.98,125.96 v1(78.72,141.7)
FX3_CTL1: P2.21 R11.2 U1.K7 | length 1109
  Top Layer w6: v1(-21,507) P2.21@-21,567.79 ; v1(352,289) 376,313 R11.2@383.41,313
  MidLayer1 w6: v1(-21,507) 4,482 4,350 36,318 36,161.96 v1(15.74,141.7)
  Bottom Layer w6: v1(-21,507) -21,437 16,400 353,400 373,380 373,310 v1(352,289) ; v1(15.74,141.7) U1.K7@31.49,125.96
FX3_CTL2: P2.20 P3.26 U1.J7 | length 2336.6
  Top Layer w6: v1@12,664 2,654 2,486 29,459 P2.20@29,416.21 v1(29,355.43) ; v1(438,-237) 468.31,-206.69 P3.26@526.23,-206.69
  MidLayer1 w6: v1@9,661 23,675 485.15,675 647.72,512.43 647.72,-156.72 567.44,-237 v1(438,-237) ; v1(15.74,110.21) 47,141.47 47,337.43 v1(29,355.43)
  Bottom Layer w6: v1(15.74,110.21) U1.J7@31.49,94.47
  other v1: 12.33,664.33
FX3_CTL3: P2.19 U1.H7 | length 540.8
  Top Layer w6: v1(29,507) P2.19@29,567.79
  MidLayer1 w6: v1(15.74,78.72) 58,120.98 58,478 v1(29,507)
  Bottom Layer w6: v1(15.74,78.72) U1.H7@31.49,62.98
FX3_CTL4_SW: P2.33 U1.G7 | length 754.1
  Top Layer w6: P2.33@-321,567.79 -321,507 -296,482 -296,307.89 -180.56,192.44 -163.56,175.44 -163.56,132.56 -58,27 -4.49,27 v1(15.74,47.23)
  Bottom Layer w6: v1(15.74,47.23) U1.G7@31.49,31.49
FX3_CTL5: P2.27 U1.G6 | length 607.1
  Top Layer w6: v1(-171,507) P2.27@-171,567.79
  MidLayer1 w6: v1(-171,507) -146,482 -146,338 -95,287 -95,142.42 -36.26,83.68 -36.26,67.74 v1(-15.75,47.23)
  Bottom Layer w6: v1(-15.75,47.23) U1.G6@0,31.49
FX3_CTL6: P2.25 U1.K6 | length 512.4
  Top Layer w6: v1(-121,507) P2.25@-121,567.79
  MidLayer1 w6: v1(-121,507) -95,481 -95,341 -73,319 -73,272 -73,164 -50.71,141.7 v1(-15.75,141.7)
  Bottom Layer w6: v1(-15.75,141.7) U1.K6@0,125.96
FX3_CTL7: P2.22 U1.H8 | length 388
  Top Layer w6: P2.22@-21,416.21 -21,309 17,271 17,205 47.23,174.76 v1(47.23,78.72)
  Bottom Layer w6: v1(47.23,78.72) U1.H8@62.98,62.98
FX3_CTL8: U1.G5 V1.2 | length 2012.5
  MidLayer1 w6: v1(-233,662) -233,500 -191,458 -191,222.87 -49,80.87 v1@-49,49 ; v1(-233,712) -218,697 494.27,697 705,486.27 705,355 v1(729,331)
  Bottom Layer w6: v1(-233,662) v1(-233,712) ; v1(-47,47) U1.G5@-31.49,31.49 ; V1.2@729.34,276 v1@729.34,330.66
FX3_CTL11: P2.24 RS1.2 U1.J5 | length 1190.5
  Top Layer w6: -71,355.43 -71,372 ; v1(-71,472) P2.24@-71,416.21 -71,372 ; v1(-53,326) -71,344 -71,372 ; v1@305.1,230.1 RS1.2@376.16,230.1
  Bottom Layer w6: v1(-71,472) -71,399 -61,389 339.27,389 361,367.27 361,332.44 325,296.44 325,268 325,250 v1(305,230) ; v1(-53,326) -79,300 -79,150 -70,141 -55,141 -46,132 -46,108.98 U1.J5@-31.49,94.47
FX3_CTL12: P2.26 RS1.1 U1.H5 | length 1118.4
  Top Layer w6: v1(-121,355.43) P2.26@-121,416.21 ; v1(305,262) 305.4,261.6 357,261.6 ; 329,261.6 357,261.6 ; RS1.1@376.16,261.6 357,261.6
  MidLayer1 w6: v1(-121,355.43) -121,338 -84,301 -84,146.98 v1(-15.75,78.72)
  Bottom Layer w6: v1(-121,355.43) -121,372 -115,378 334.71,378 350,362.71 350,337 305,292 v1(305,262) ; U1.H5@-31.49,62.98 v1(-15.75,78.72)
FX3_CTL15: R3.2 U1.L8 | length 126.4
  Bottom Layer w6: 57,221 57,208 ; R3.2@57,268.41 57,208 ; U1.L8@62.98,157.45 57,163.43 57,208
FX3_DQ0: P2.14 RS3.2 U1.F10 | length 2418.6
  Top Layer w6: v1(110.21,15.74) 110.21,47.23 99,58.45 99,141 120,162 120,212 147,239 206,298 206,349 188,367 179,376 P2.14@179,416.21 179,480 155,504 155,609 v1(187,641) ; RS3.2@376.16,-42.9 348.84,-42.9 344.5,-47.24 344.5,-193.5 356,-205 v1(401,-205)
  MidLayer1 w6: v1(187,641) 201,655 489.6,655 635,509.6 635,-153.89 586.89,-202 560,-202 543,-185 421,-185 v1(401,-205)
  Bottom Layer w6: v1(110.21,15.74) U1.F10@125.96,0
FX3_DQ1: P2.31 RS3.1 U1.F9 | length 3255.3
  Top Layer w6: v1(-271,507) P2.31@-271,567.79 ; RS3.1@376.16,-11.4 343.6,-11.4 333.5,-21.5 333.5,-208.5 356,-231 v1(382,-231)
  MidLayer1 w6: v1@73.47,21 -55.33,21 -246,211.67 -246,482 v1(-271,507) -271,643 -271,671 -256,686 489.71,686 660,515.71 660,-160 563,-257 408,-257 v1(382,-231)
  Bottom Layer w6: v1(78.72,15.74) U1.F9@94.47,0
FX3_DQ2: P2.35 RS2.4 U1.F7 | length 2334.8
  Top Layer w6: P2.35@-371,567.79 v1(-371,513) -371,507 -346,482 -346,326.77 -185.56,166.33 -185.56,122.44 -68.11,5 -5,5 v1(15.74,-15.75) ; v1(329,31.1) RS2.4@376.16,31.1
  Bottom Layer w6: v1(-371,513) -371,542 -356,557 254.56,557 294,517.56 294,475 303,466 394.11,466 464,396.11 464,202 493,173 493,62 471.81,40.81 338.71,40.81 v1(329,31.1) ; v1(15.74,-15.75) U1.F7@31.49,0
FX3_DQ3: P2.13 RS2.3 U1.G10 | length 1368.2
  Top Layer w6: v1(141.7,47.23) 110.7,78.23 110.7,137.15 131,157.44 131,207.44 217,293.44 217,353.56 204,366.56 204,482 179,507 P2.13@179,567.79 ; v1(329,62.11) RS2.3@376.16,62.11
  Bottom Layer w6: U1.G10@125.96,31.49 v1(141.7,47.23) ; v1(179,509) 250.56,509 270.94,488.62 270.94,453.76 280.7,444 385,444 442,387 442,247.77 361.7,167.47 361.7,98.02 329,65.32 v1(329,62.11)
FX3_DQ4: P2.16 RS2.2 U1.G9 | length 1212.1
  Top Layer w6: v1(129,358) P2.16@129,416.21 129,445 v1(156,472) ; v1(329,93.6) RS2.2@376.16,93.6
  MidLayer1 w6: v1(78.72,47.23) 121.7,90.21 121.7,350.7 v1(129,358)
  Bottom Layer w6: v1(78.72,47.23) U1.G9@94.47,31.49 ; v1(156,472) 183,472 209,498 246,498 259.94,484.06 259.7,483.82 259.7,446.3 273,433 378.23,433 431,380.23 431,252.33 350.7,172.03 350.7,115.3 v1(329,93.6)
FX3_DQ5: P2.32 RS2.1 U1.F8 | length 1953.6
  Top Layer w6: v1(-271,355.43) P2.32@-271,416.21 ; RS2.1@376.16,125.1 392.1,125.1 414,147 v1(471,147)
  MidLayer1 w6: v1(-271,355.43) -271,218 -62,9 22.49,9 v1(47.23,-15.75)
  Bottom Layer w6: v1(-271,355.43) -271,469 -194,546 250,546 283,513 283,463.94 291.94,455 389.56,455 453,391.56 453,165 v1(471,147) ; v1(47.23,-15.75) U1.F8@62.98,0
FX3_DQ6: P2.12 RS1.4 U1.H10 | length 1015
  Top Layer w6: v1(141.7,78.72) 121.7,98.72 121.7,132.59 142,152.89 142,202.89 229,289.89 P2.12@229,416.21 v1(229,473) ; v1(329,167.6) RS1.4@376.16,167.6
  Bottom Layer w6: U1.H10@125.96,62.98 v1(141.7,78.72) ; v1(229,473) 229,438 245,422 373.67,422 420,375.67 420,256.89 330.71,167.6 v1(329,167.6)
FX3_DQ7: P2.17 RS1.3 U1.H9 | length 1192.1
  Top Layer w6: v1(79,475) P2.17@79,567.79 ; v1(329,198.61) RS1.3@376.16,198.61
  MidLayer1 w6: v1(78.72,78.72) 110.7,110.7 110.7,301 99,312.7 99,455 v1(79,475)
  Bottom Layer w6: v1(78.72,78.72) U1.H9@94.47,62.98 ; 79,463 79,423 91,411 369.11,411 409,371.11 409,261.44 346.16,198.61 v1(329,198.61)
FX3_DQ8: P2.11 U1.J10 | length 536.7
  Top Layer w6: v1(141.7,110.21) 141.7,132.7 153,144 153,198.33 254,299.33 254,482 229,507 P2.11@229,567.79
  Bottom Layer w6: U1.J10@125.96,94.47 v1(141.7,110.21)
FX3_DQ9: P2.18 U1.J9 | length 344.7
  Top Layer w6: v1(79,355.43) P2.18@79,416.21
  MidLayer1 w6: v1(78.72,110.21) 78.72,113.42 98.72,133.42 98.72,293.27 79,313 v1(79,355.43)
  Bottom Layer w6: v1(78.72,110.21) U1.J9@94.47,94.47
FX3_DQ10: P2.7 U1.K11 | length 552.9
  Top Layer w6: v1(281,285) 281,305 294.92,318.92 324.92,318.92 356.04,350.04 356.04,459 329,486.04 P2.7@329,567.79
  Bottom Layer w6: U1.K11@157.45,125.96 193.19,161.7 193.19,185.64 198.17,190.61 201.28,193.72 281,273.44 v1(281,285)
FX3_DQ11: P2.9 U1.L10 | length 604
  Top Layer w6: v1(302.92,338.92) 302.92,490.08 279,514 P2.9@279,567.79 279,599 v1(304,624)
  Bottom Layer w6: U1.L10@125.96,157.45 125.96,198.96 137.2,210.2 186.64,210.2 246,269.56 246,307.44 265.56,327 291,327 v1(302.92,338.92)
FX3_DQ12: P2.8 U1.K10 | length 419.6
  Top Layer w6: v1(329,355.43) P2.8@329,416.21
  Bottom Layer w6: U1.K10@125.96,125.96 141,141 141,186.89 153.06,198.94 190.94,198.94 257,265 257,302.89 265.61,311.5 304.94,311.5 329,335.56 v1(329,355.43)